# EAGLE board untitled1 (EAGLE 9.5.2)
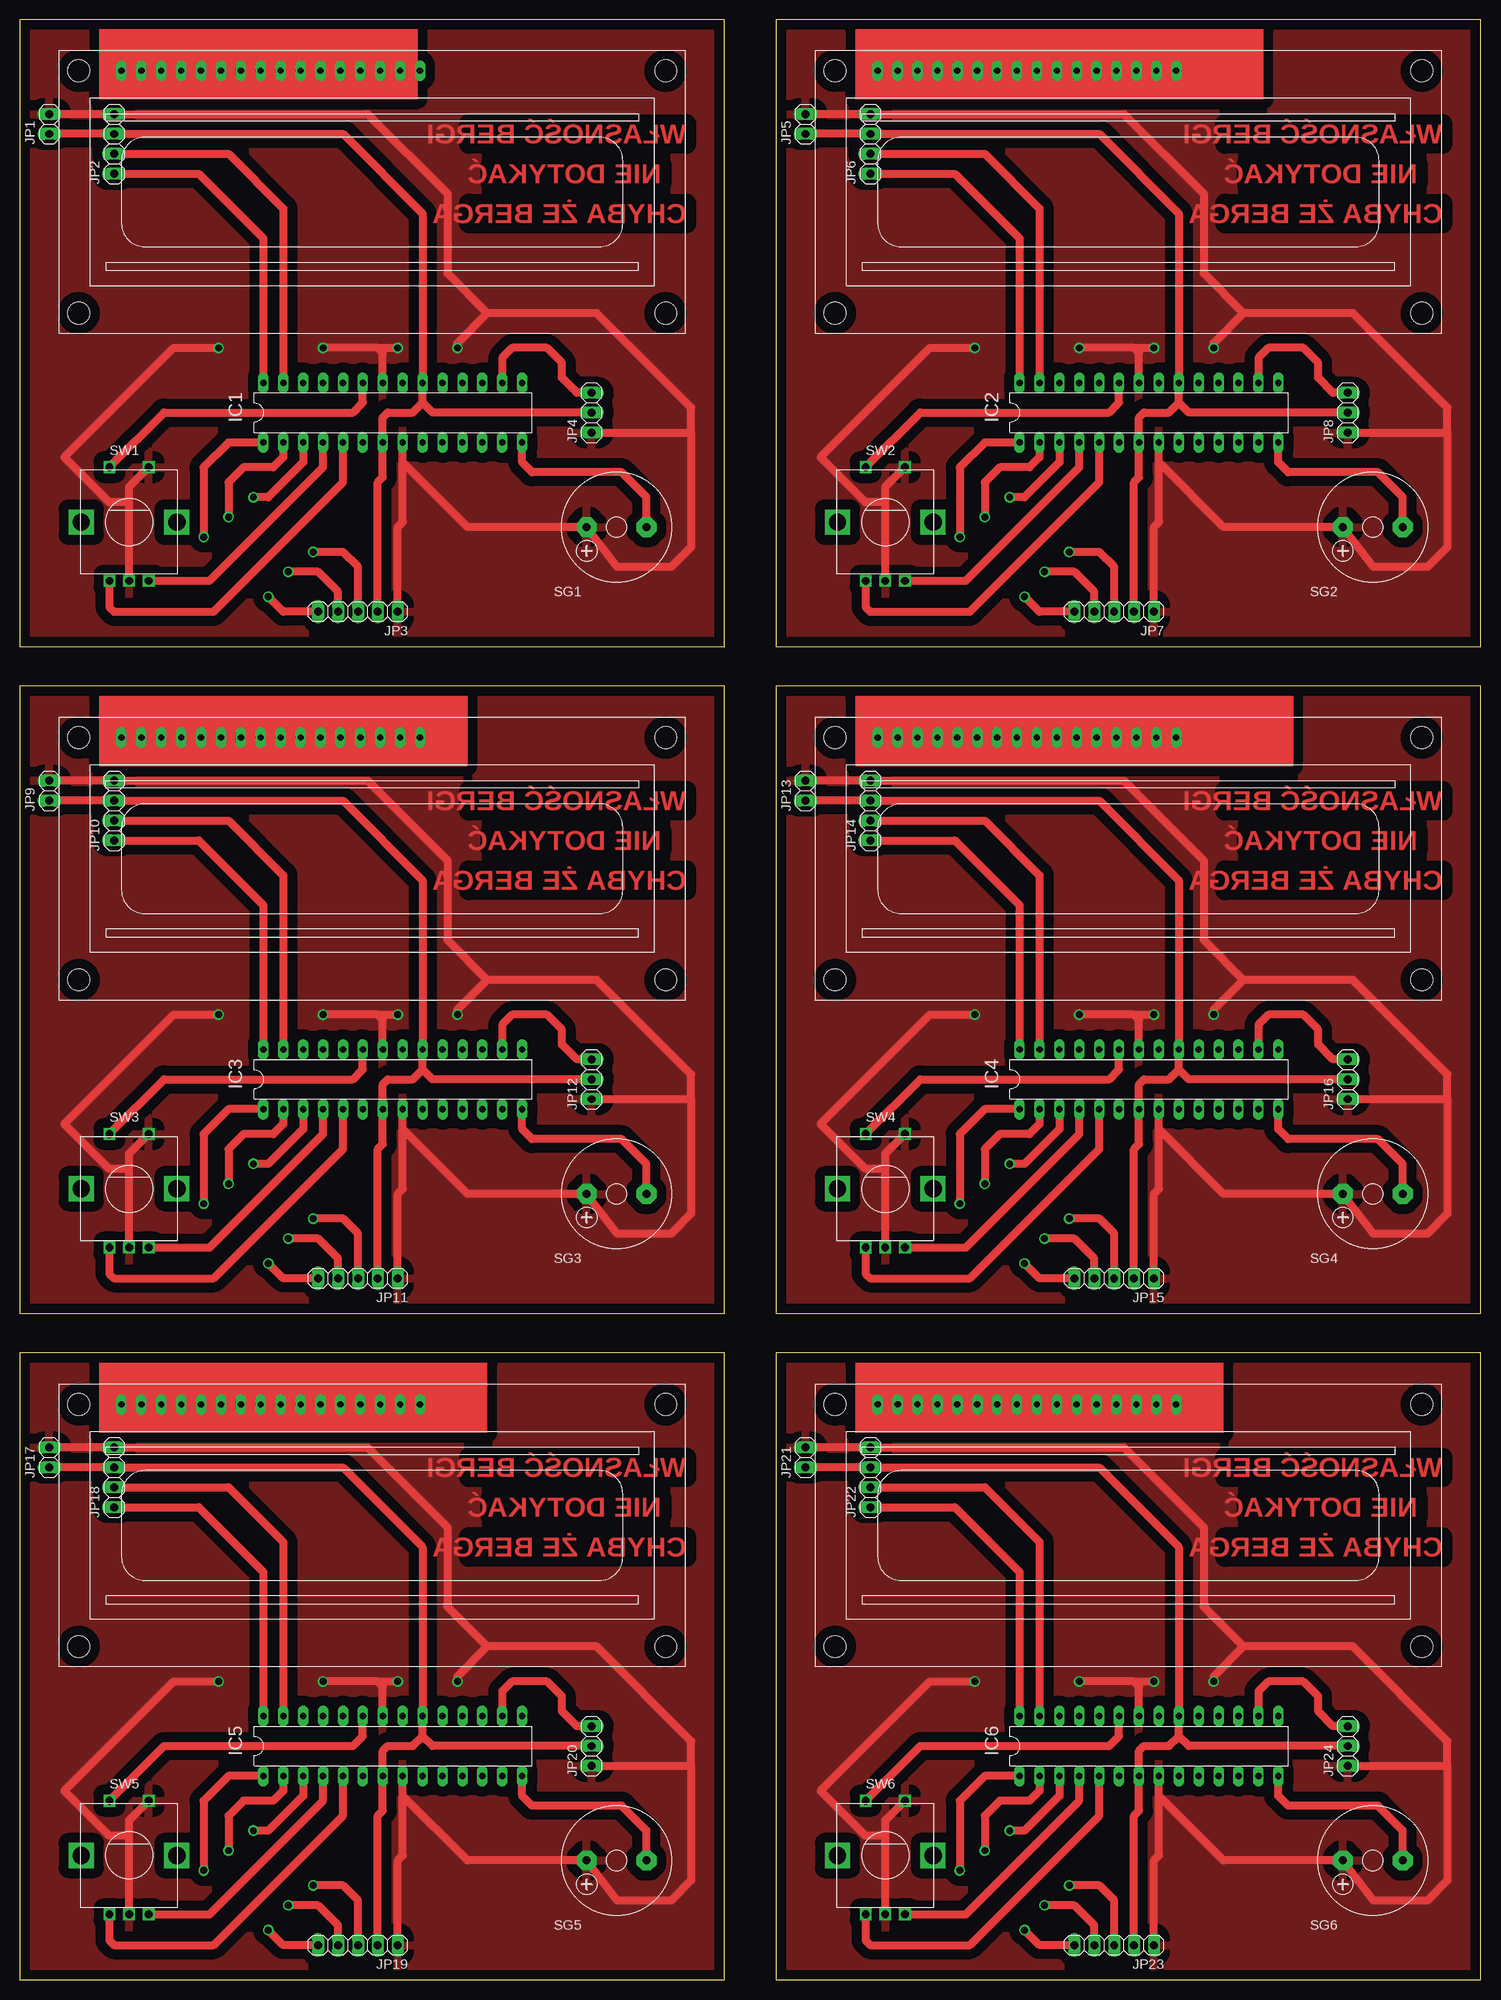
[diagram p0: board, top side]
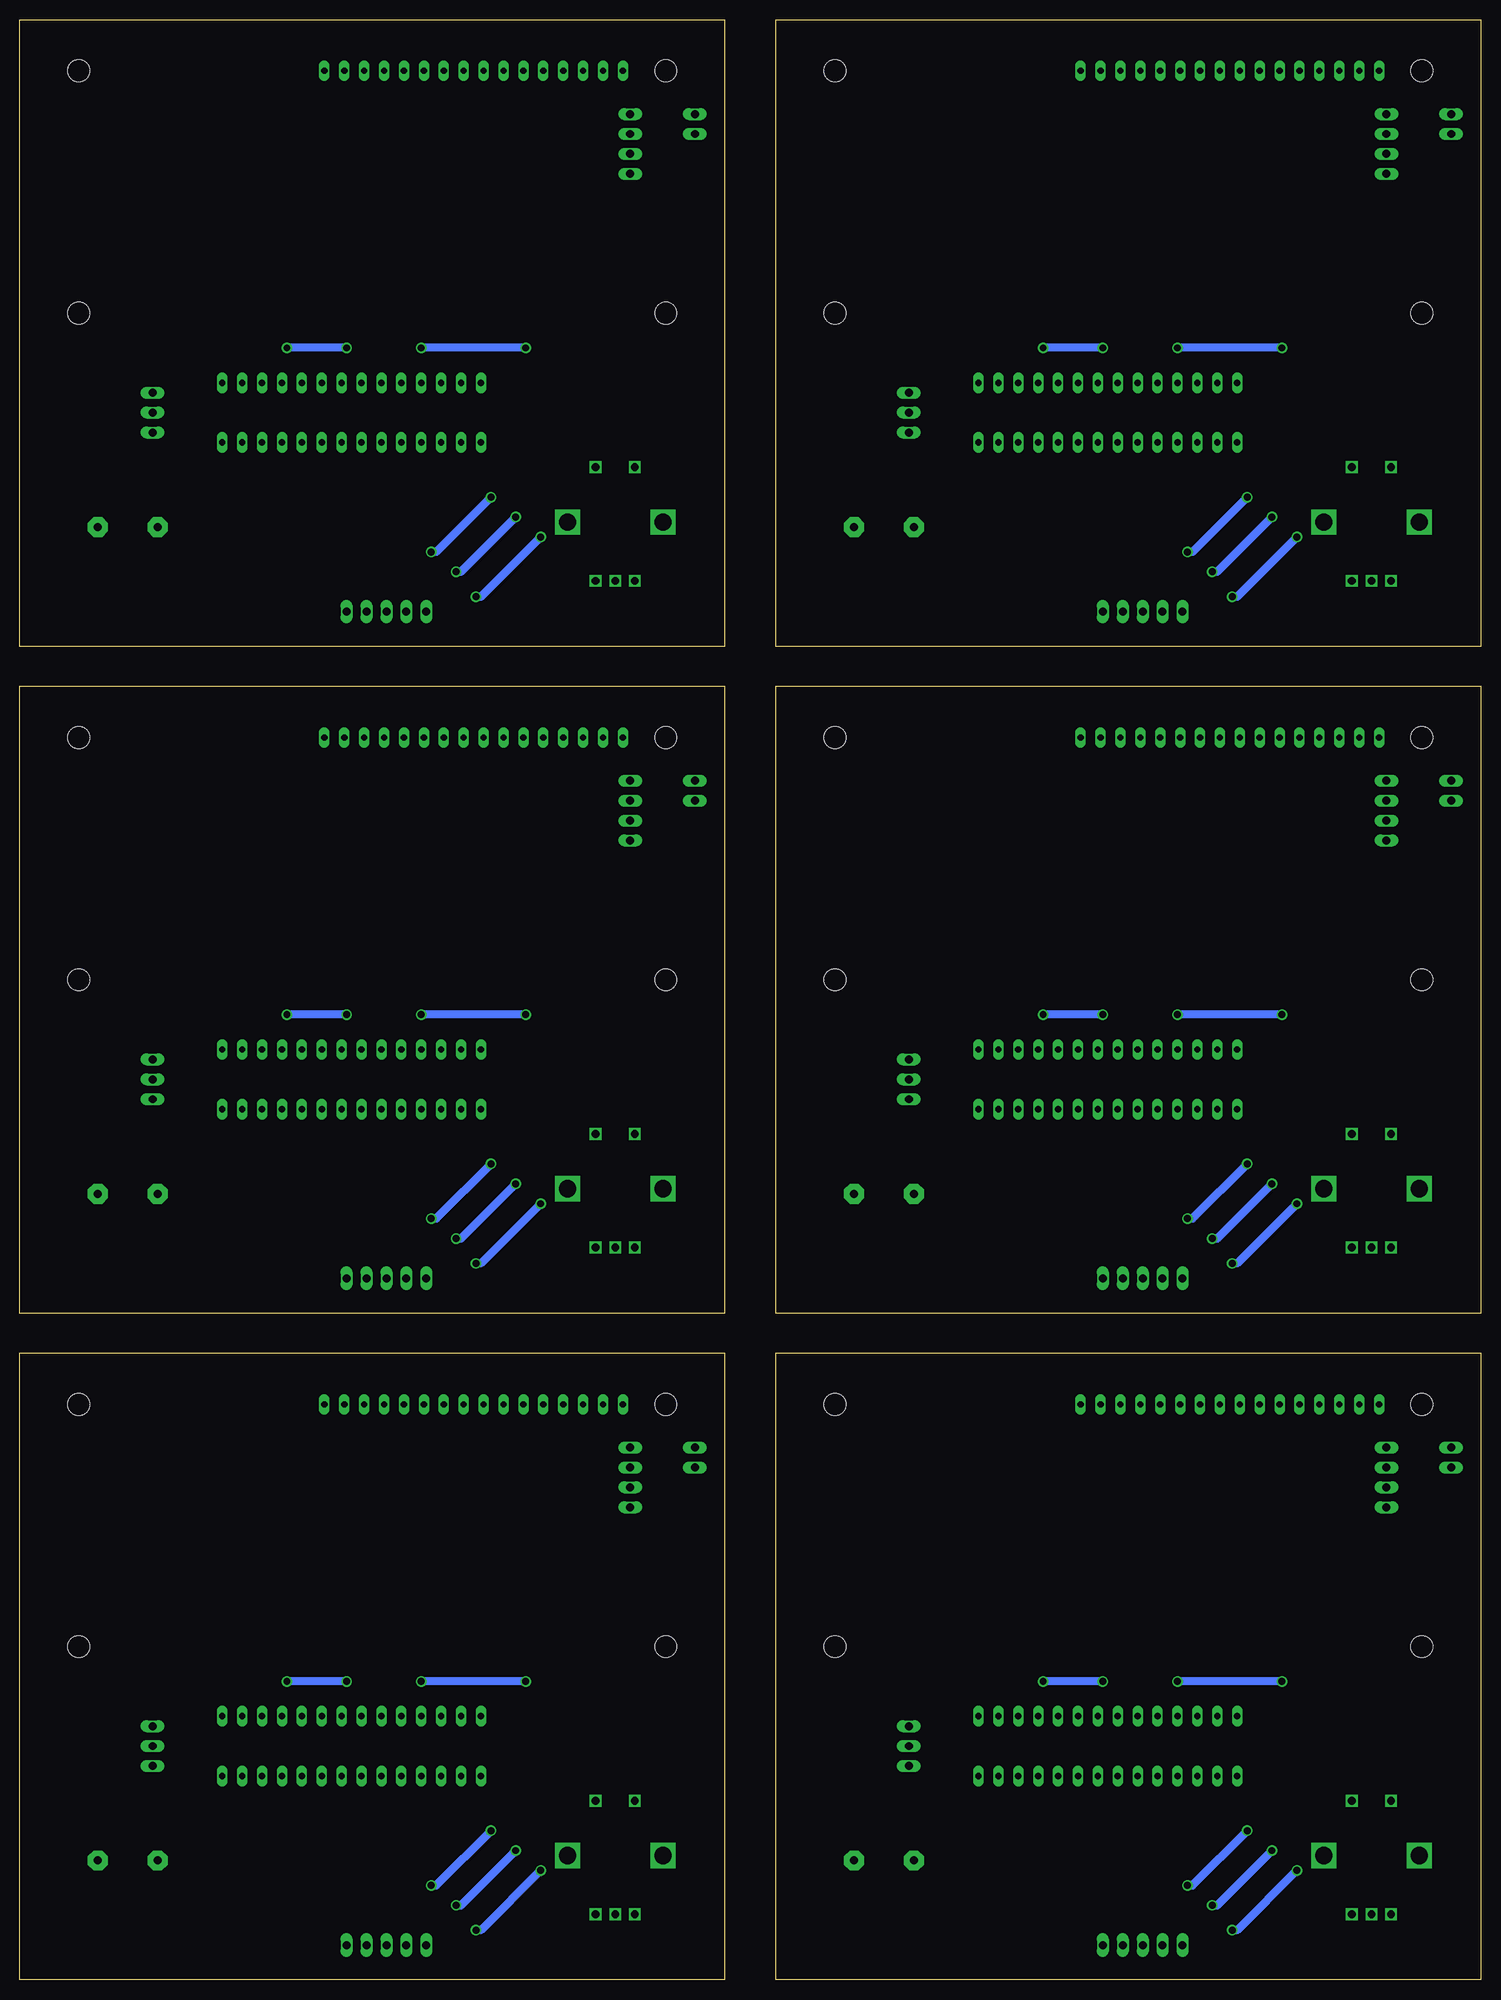
[diagram p1: board, bottom side, seen from below]

Size 186.52 x 250.18 mm. Coordinates in mm from the lower left corner, seen from the top.
Outline: 0,170.18 90,170.18 90,250.18 0,250.18 0,170.18
Outline: 96.52,170.18 186.52,170.18 186.52,250.18 96.52,250.18 96.52,170.18
Outline: 0,85.09 90,85.09 90,165.09 0,165.09 0,85.09
Outline: 96.52,85.09 186.52,85.09 186.52,165.09 96.52,165.09 96.52,85.09
Outline: 0,0 90,0 90,80 0,80 0,0
Outline: 96.52,0 186.52,0 186.52,80 96.52,80 96.52,0
Copper layers (1*16): Top 0.035mm / dielectric 1.5mm / Bottom 0.035mm
Design rules "default *": minimum track width 40mil, minimum drill 0.35mm, track to track 50mil, track to pad 50mil, pad to pad 50mil, via to via 50mil, smd to smd 50mil, copper to edge 50mil, drill to drill 50mil, minimum pad ring 10mil, minimum via ring 8mil, stop-mask expansion 4mil, vias tented up to drill 0mil, thermal gap 50mil

## Footprints (pad centres in the part's own frame; a part is rotated, then mirrored left to right if it is on the bottom)
DIL28-3 = drill 0.813 long: 1 -16.51,-3.81; 2 -13.97,-3.81; 3 -11.43,-3.81; 4 -8.89,-3.81; 5 -6.35,-3.81; 6 -3.81,-3.81; 7 -1.27,-3.81; 8 1.27,-3.81; 9 3.81,-3.81; 10 6.35,-3.81; 11 8.89,-3.81; 12 11.43,-3.81; 13 13.97,-3.81; 14 16.51,-3.81; 15 16.51,3.81; 16 13.97,3.81; 17 11.43,3.81; 18 8.89,3.81; 19 6.35,3.81; 20 3.81,3.81; 21 1.27,3.81; 22 -1.27,3.81; 23 -3.81,3.81; 24 -6.35,3.81; 25 -8.89,3.81; 26 -11.43,3.81; 27 -13.97,3.81; 28 -16.51,3.81
1X02 = drill 1.016 long: 1 -1.27,0; 2 1.27,0
1X04 = drill 1.016 long: 1 -3.81,0; 2 -1.27,0; 3 1.27,0; 4 3.81,0
1X05 = drill 1.016 long: 1 -5.08,0; 2 -2.54,0; 3 0,0; 4 2.54,0; 5 5.08,0
1X03 = drill 1.016 long: 1 -2.54,0; 2 0,0; 3 2.54,0
F/CM12P = drill 1.016 pad 2.54 octagon: + 3.81,0; - -3.81,0
ALPS_EC12E_SW = drill 1 square: A -2.5,-7.5; B 2.5,-7.5; C 0,-7.5; D -2.5,7; E 2.5,7 | drill 2.2 square: GND1 -6.1,0; GND2 6.1,0
LCD1602 = drill 0.8 long: 1 8,33.46; 2 10.54,33.46; 3 13.08,33.46; 4 15.62,33.46; 5 18.16,33.46; 6 20.7,33.46; 7 23.24,33.46; 8 25.78,33.46; 9 28.32,33.46; 10 30.86,33.46; 11 33.4,33.46; 12 35.94,33.46; 13 38.48,33.46; 14 41.02,33.46; 15 43.56,33.46; 16 46.1,33.46 | hole 2.8: 2.54,2.54; 2.54,33.46; 77.46,33.46; 77.46,2.54

## Placement (x,y rotation side)
IC1  ATMEGA168-20P  [DIL28-3]  47.62,200.03 0 top
IC2  ATMEGA168-20P  [DIL28-3]  144.14,200.03 0 top
IC3  ATMEGA168-20P  [DIL28-3]  47.62,114.94 0 top
IC4  ATMEGA168-20P  [DIL28-3]  144.14,114.94 0 top
IC5  ATMEGA168-20P  [DIL28-3]  47.62,29.84 0 top
IC6  ATMEGA168-20P  [DIL28-3]  144.14,29.84 0 top
JP1  [1X02]  3.81,236.86 90 top
JP2  [1X04]  12.07,234.31 90 top
JP3  [1X05]  43.18,174.62 180 top
JP4  [1X03]  73.03,200.03 90 top
JP5  [1X02]  100.33,236.86 90 top
JP6  [1X04]  108.59,234.31 90 top
JP7  [1X05]  139.7,174.62 180 top
JP8  [1X03]  169.54,200.03 90 top
JP9  [1X02]  3.81,151.77 90 top
JP10  [1X04]  12.07,149.23 90 top
JP11  [1X05]  43.18,89.54 180 top
JP12  [1X03]  73.03,114.94 90 top
JP13  [1X02]  100.33,151.77 90 top
JP14  [1X04]  108.59,149.23 90 top
JP15  [1X05]  139.7,89.54 180 top
JP16  [1X03]  169.54,114.94 90 top
JP17  [1X02]  3.81,66.68 90 top
JP18  [1X04]  12.07,64.14 90 top
JP19  [1X05]  43.18,4.44 180 top
JP20  [1X03]  73.03,29.84 90 top
JP21  [1X02]  100.33,66.68 90 top
JP22  [1X04]  108.59,64.14 90 top
JP23  [1X05]  139.7,4.44 180 top
JP24  [1X03]  169.54,29.84 90 top
SG1  F/CM12P  [F/CM12P]  76.2,185.42 180 top
SG2  F/CM12P  [F/CM12P]  172.72,185.42 180 top
SG3  F/CM12P  [F/CM12P]  76.2,100.33 180 top
SG4  F/CM12P  [F/CM12P]  172.72,100.33 180 top
SG5  F/CM12P  [F/CM12P]  76.2,15.24 180 top
SG6  F/CM12P  [F/CM12P]  172.72,15.24 180 top
SW1  EC12E_SW  [ALPS_EC12E_SW]  13.97,186.06 0 top
SW2  EC12E_SW  [ALPS_EC12E_SW]  110.49,186.06 0 top
SW3  EC12E_SW  [ALPS_EC12E_SW]  13.97,100.97 0 top
SW4  EC12E_SW  [ALPS_EC12E_SW]  110.49,100.97 0 top
SW5  EC12E_SW  [ALPS_EC12E_SW]  13.97,15.88 0 top
SW6  EC12E_SW  [ALPS_EC12E_SW]  110.49,15.88 0 top
X1  HD44780LCD-1602  [LCD1602]  5,210.18 0 top
X2  HD44780LCD-1602  [LCD1602]  101.52,210.18 0 top
X3  HD44780LCD-1602  [LCD1602]  5,125.09 0 top
X4  HD44780LCD-1602  [LCD1602]  101.52,125.09 0 top
X5  HD44780LCD-1602  [LCD1602]  5,40 0 top
X6  HD44780LCD-1602  [LCD1602]  101.52,40 0 top

## Library data of the parts
IC1-IC6 X1-X6 = adafruit
JP1-JP24 = pinhead
SG1-SG6 = buzzer; OC_FARNELL: unknown; OC_NEWARK: unknown
SW1-SW6 = switch-alps; MPN: EC12E2424407; OC_FARNELL: 1520813; OC_NEWARK: 74M1068

## Nets
GND: IC1.8 IC1.22 JP1.2 JP2.4 JP3.1 JP4.1 SG1.+ SW1.C SW1.E
GND1: IC2.8 IC2.22 JP5.2 JP6.4 JP7.1 JP8.1 SG2.+ SW2.C SW2.E
GND2: IC3.8 IC3.22 JP9.2 JP10.4 JP11.1 JP12.1 SG3.+ SW3.C SW3.E
GND3: IC4.8 IC4.22 JP13.2 JP14.4 JP15.1 JP16.1 SG4.+ SW4.C SW4.E
GND4: IC5.8 IC5.22 JP17.2 JP18.4 JP19.1 JP20.1 SG5.+ SW5.C SW5.E
GND5: IC6.8 IC6.22 JP21.2 JP22.4 JP23.1 JP24.1 SG6.+ SW6.C SW6.E
N$1: IC1.3 JP3.3
N$2: IC1.23 SW1.D
N$3: IC1.4 SW1.B
N$4: IC1.5 SW1.A
N$5: IC1.2 JP3.4
N$6: IC1.14 SG1.-
N$7: IC1.1 JP3.5
N$8: IC2.23 SW2.D
N$9: IC1.16 JP4.3
N$10: IC2.4 SW2.B
N$11: IC2.5 SW2.A
N$12: IC2.16 JP8.3
N$13: IC2.14 SG2.-
N$14: IC2.3 JP7.3
N$15: IC2.2 JP7.4
N$16: IC2.1 JP7.5
N$17: IC3.23 SW3.D
N$18: IC3.4 SW3.B
N$19: IC3.5 SW3.A
N$20: IC3.16 JP12.3
N$21: IC3.14 SG3.-
N$22: IC3.3 JP11.3
N$23: IC3.2 JP11.4
N$24: IC3.1 JP11.5
N$25: IC4.23 SW4.D
N$26: IC4.4 SW4.B
N$27: IC4.5 SW4.A
N$28: IC4.16 JP16.3
N$29: IC4.14 SG4.-
N$30: IC4.3 JP15.3
N$31: IC4.2 JP15.4
N$32: IC4.1 JP15.5
N$33: IC5.23 SW5.D
N$34: IC5.4 SW5.B
N$35: IC5.5 SW5.A
N$36: IC5.16 JP20.3
N$37: IC5.14 SG5.-
N$38: IC5.3 JP19.3
N$39: IC5.2 JP19.4
N$40: IC5.1 JP19.5
N$41: IC6.23 SW6.D
N$42: IC6.4 SW6.B
N$43: IC6.5 SW6.A
N$44: IC6.16 JP24.3
N$45: IC6.14 SG6.-
N$46: IC6.3 JP23.3
N$47: IC6.2 JP23.4
N$48: IC6.1 JP23.5
SCL: IC1.28 JP2.1
SCL1: IC2.28 JP6.1
SCL2: IC3.28 JP10.1
SCL3: IC4.28 JP14.1
SCL4: IC5.28 JP18.1
SCL5: IC6.28 JP22.1
SDA: IC1.27 JP2.2
SDA1: IC2.27 JP6.2
SDA2: IC3.27 JP10.2
SDA3: IC4.27 JP14.2
SDA4: IC5.27 JP18.2
SDA5: IC6.27 JP22.2
VCC: IC1.7 IC1.20 JP1.1 JP2.3 JP3.2 JP4.2
VCC1: IC2.7 IC2.20 JP5.1 JP6.3 JP7.2 JP8.2
VCC2: IC3.7 IC3.20 JP9.1 JP10.3 JP11.2 JP12.2
VCC3: IC4.7 IC4.20 JP13.1 JP14.3 JP15.2 JP16.2
VCC4: IC5.7 IC5.20 JP17.1 JP18.3 JP19.2 JP20.2
VCC5: IC6.7 IC6.20 JP21.1 JP22.3 JP23.2 JP24.2

## Tracks (layer width: path | path; a pad name or v marks a point on that pad's centre or on a via)
GND  (via drill 0.89)
  Top 1.016: JP1.2 JP2.4 44.45,238.12 54.61,227.97 54.61,217.81 59.69,212.73 | SW1.C 13.97,188.59 | 13.97,188.59 13.97,190.56 SW1.E | 48.89,193.68 57.15,185.42 SG1.+ 76.28,180.34 83.19,180.34 85.73,182.88 85.73,197.49 | 48.89,193.68 IC1.8 | JP3.1 48.26,185.42 48.89,186.06 48.89,193.68 | 13.97,188.59 11.43,188.59 5.71,194.31 19.68,208.28 v25.4,208.28 | IC1.22 46.35,207.65 45.72,208.28 | 45.72,208.28 v38.73,208.28 | 45.72,208.28 v48.26,208.28 | JP4.1 85.73,197.49 | 85.73,197.49 85.73,200.66 73.66,212.73 59.69,212.73 | 59.69,212.73 55.88,208.92 v55.88,208.28
  Bottom 1.016: v25.4,208.28 v38.73,208.28 | v48.26,208.28 v55.88,208.28
  pour Top: 0,250.19 0,170.18 90.17,170.18 90.17,250.19
GND1  (via drill 0.89)
  Top 1.016: JP5.2 JP6.4 140.97,238.12 151.13,227.97 151.13,217.81 156.21,212.73 | SW2.C 110.49,188.59 | 110.49,188.59 110.49,190.56 SW2.E | 145.41,193.68 153.67,185.42 SG2.+ 172.8,180.34 179.7,180.34 182.24,182.88 182.24,197.49 | 145.41,193.68 IC2.8 | JP7.1 144.78,185.42 145.41,186.06 145.41,193.68 | 110.49,188.59 107.95,188.59 102.23,194.31 116.2,208.28 v121.92,208.28 | IC2.22 142.88,207.65 142.24,208.28 | 142.24,208.28 v135.25,208.28 | 142.24,208.28 v144.78,208.28 | JP8.1 182.24,197.49 | 182.24,197.49 182.24,200.66 170.18,212.73 156.21,212.73 | 156.21,212.73 152.4,208.92 v152.4,208.28
  Bottom 1.016: v121.92,208.28 v135.25,208.28 | v144.78,208.28 v152.4,208.28
  pour Top: 96.52,250.19 96.52,170.18 186.69,170.18 186.69,250.19
GND2  (via drill 0.89)
  Top 1.016: JP9.2 JP10.4 44.45,153.03 54.61,142.88 54.61,132.72 59.69,127.64 | SW3.C 13.97,103.51 | 13.97,103.51 13.97,105.47 SW3.E | 48.89,108.59 57.15,100.33 SG3.+ 76.28,95.25 83.19,95.25 85.73,97.79 85.73,112.4 | 48.89,108.59 IC3.8 | JP11.1 48.26,100.33 48.89,100.97 48.89,108.59 | 13.97,103.51 11.43,103.51 5.71,109.22 19.68,123.19 v25.4,123.19 | IC3.22 46.35,122.56 45.72,123.19 | 45.72,123.19 v38.73,123.19 | 45.72,123.19 v48.26,123.19 | JP12.1 85.73,112.4 | 85.73,112.4 85.73,115.57 73.66,127.64 59.69,127.64 | 59.69,127.64 55.88,123.83 v55.88,123.19
  Bottom 1.016: v25.4,123.19 v38.73,123.19 | v48.26,123.19 v55.88,123.19
  pour Top: 0,165.1 0,85.09 90.17,85.09 90.17,165.1
GND3  (via drill 0.89)
  Top 1.016: JP13.2 JP14.4 140.97,153.03 151.13,142.88 151.13,132.72 156.21,127.64 | SW4.C 110.49,103.51 | 110.49,103.51 110.49,105.47 SW4.E | 145.41,108.59 153.67,100.33 SG4.+ 172.8,95.25 179.7,95.25 182.24,97.79 182.24,112.4 | 145.41,108.59 IC4.8 | JP15.1 144.78,100.33 145.41,100.97 145.41,108.59 | 110.49,103.51 107.95,103.51 102.23,109.22 116.2,123.19 v121.92,123.19 | IC4.22 142.88,122.56 142.24,123.19 | 142.24,123.19 v135.25,123.19 | 142.24,123.19 v144.78,123.19 | JP16.1 182.24,112.4 | 182.24,112.4 182.24,115.57 170.18,127.64 156.21,127.64 | 156.21,127.64 152.4,123.83 v152.4,123.19
  Bottom 1.016: v121.92,123.19 v135.25,123.19 | v144.78,123.19 v152.4,123.19
  pour Top: 96.52,165.1 96.52,85.09 186.69,85.09 186.69,165.1
GND4  (via drill 0.89)
  Top 1.016: JP17.2 JP18.4 44.45,67.95 54.61,57.79 54.61,47.62 59.69,42.55 | SW5.C 13.97,18.42 | 13.97,18.42 13.97,20.38 SW5.E | 48.89,23.5 57.15,15.24 SG5.+ 76.28,10.16 83.19,10.16 85.73,12.7 85.73,27.31 | 48.89,23.5 IC5.8 | JP19.1 48.26,15.24 48.89,15.88 48.89,23.5 | 13.97,18.42 11.43,18.42 5.71,24.13 19.68,38.1 v25.4,38.1 | IC5.22 46.35,37.47 45.72,38.1 | 45.72,38.1 v38.73,38.1 | 45.72,38.1 v48.26,38.1 | JP20.1 85.73,27.31 | 85.73,27.31 85.73,30.48 73.66,42.55 59.69,42.55 | 59.69,42.55 55.88,38.74 v55.88,38.1
  Bottom 1.016: v25.4,38.1 v38.73,38.1 | v48.26,38.1 v55.88,38.1
  pour Top: 0,80.01 0,0 90.17,0 90.17,80.01
GND5  (via drill 0.89)
  Top 1.016: JP21.2 JP22.4 140.97,67.95 151.13,57.79 151.13,47.62 156.21,42.55 | SW6.C 110.49,18.42 | 110.49,18.42 110.49,20.38 SW6.E | 145.41,23.5 153.67,15.24 SG6.+ 172.8,10.16 179.7,10.16 182.24,12.7 182.24,27.31 | 145.41,23.5 IC6.8 | JP23.1 144.78,15.24 145.41,15.88 145.41,23.5 | 110.49,18.42 107.95,18.42 102.23,24.13 116.2,38.1 v121.92,38.1 | IC6.22 142.88,37.47 142.24,38.1 | 142.24,38.1 v135.25,38.1 | 142.24,38.1 v144.78,38.1 | JP24.1 182.24,27.31 | 182.24,27.31 182.24,30.48 170.18,42.55 156.21,42.55 | 156.21,42.55 152.4,38.74 v152.4,38.1
  Bottom 1.016: v121.92,38.1 v135.25,38.1 | v144.78,38.1 v152.4,38.1
  pour Top: 96.52,80.01 96.52,0 186.69,0 186.69,80.01
N$1  (via drill 0.89)
  Top 1.016: IC1.3 36.2,193.68 31.75,189.23 v29.84,189.23 | JP3.3 43.18,180.34 41.27,182.25 v37.46,182.25
  Bottom 1.016: v29.84,189.23 36.83,182.25 v37.46,182.25
N$2
  Top 1.016: SW1.D 18.44,200.03 42.54,200.03 43.81,201.3 IC1.23
N$3
  Top 1.016: SW1.B 24.25,178.56 38.73,193.04 IC1.4
N$4
  Top 1.016: SW1.A 11.47,175.22 12.07,174.62 24.77,174.62 41.27,191.13 IC1.5
N$5  (via drill 0.89)
  Top 1.016: JP3.4 40.64,177.17 38.1,179.71 v34.29,179.71 | IC1.2 33.65,194.31 32.38,193.04 28.57,193.04 26.67,191.13 v26.67,186.69
  Bottom 1.016: v26.67,186.69 33.65,179.71 v34.29,179.71
N$6
  Top 1.016: SG1.- 80.01,189.28 79.93,189.31 76.84,192.41 65.41,192.41 64.14,193.68 IC1.14
N$7  (via drill 0.89)
  Top 1.016: IC1.1 26.67,196.22 23.5,193.04 v23.5,184.15 | JP3.5 33.65,174.62 v31.75,176.53
  Bottom 1.016: v23.5,184.15 31.11,176.53 v31.75,176.53
N$8
  Top 1.016: SW2.D 114.96,200.03 139.06,200.03 140.33,201.3 IC2.23
N$9
  Top 1.016: JP4.3 71.12,202.56 69.22,204.47 69.22,206.38 67.31,208.28 62.87,208.28 61.59,207.01 IC1.16
N$10
  Top 1.016: SW2.B 120.77,178.56 135.25,193.04 IC2.4
N$11
  Top 1.016: SW2.A 107.99,175.22 108.59,174.62 121.29,174.62 137.79,191.13 IC2.5
N$12
  Top 1.016: JP8.3 167.64,202.56 165.73,204.47 165.73,206.38 163.83,208.28 159.38,208.28 158.11,207.01 IC2.16
N$13
  Top 1.016: SG2.- 176.53,189.28 176.45,189.31 173.35,192.41 161.92,192.41 160.66,193.68 IC2.14
N$14  (via drill 0.89)
  Top 1.016: IC2.3 132.72,193.68 128.27,189.23 v126.37,189.23 | JP7.3 139.7,180.34 137.79,182.25 v133.98,182.25
  Bottom 1.016: v126.37,189.23 133.35,182.25 v133.98,182.25
N$15  (via drill 0.89)
  Top 1.016: JP7.4 137.16,177.17 134.62,179.71 v130.81,179.71 | IC2.2 130.17,194.31 128.91,193.04 125.09,193.04 123.19,191.13 v123.19,186.69
  Bottom 1.016: v123.19,186.69 130.17,179.71 v130.81,179.71
N$16  (via drill 0.89)
  Top 1.016: IC2.1 123.19,196.22 120.02,193.04 v120.02,184.15 | JP7.5 130.17,174.62 v128.27,176.53
  Bottom 1.016: v120.02,184.15 127.64,176.53 v128.27,176.53
N$17
  Top 1.016: SW3.D 18.44,114.94 42.54,114.94 43.81,116.21 IC3.23
N$18
  Top 1.016: SW3.B 24.25,93.47 38.73,107.95 IC3.4
N$19
  Top 1.016: SW3.A 11.47,90.13 12.07,89.54 24.77,89.54 41.27,106.05 IC3.5
N$20
  Top 1.016: JP12.3 71.12,117.48 69.22,119.38 69.22,121.28 67.31,123.19 62.87,123.19 61.59,121.92 IC3.16
N$21
  Top 1.016: SG3.- 80.01,104.19 79.93,104.22 76.84,107.31 65.41,107.31 64.14,108.59 IC3.14
N$22  (via drill 0.89)
  Top 1.016: IC3.3 36.2,108.59 31.75,104.14 v29.84,104.14 | JP11.3 43.18,95.25 41.27,97.16 v37.46,97.16
  Bottom 1.016: v29.84,104.14 36.83,97.16 v37.46,97.16
N$23  (via drill 0.89)
  Top 1.016: JP11.4 40.64,92.08 38.1,94.62 v34.29,94.62 | IC3.2 33.65,109.22 32.38,107.95 28.57,107.95 26.67,106.05 v26.67,101.6
  Bottom 1.016: v26.67,101.6 33.65,94.62 v34.29,94.62
N$24  (via drill 0.89)
  Top 1.016: IC3.1 26.67,111.12 23.5,107.95 v23.5,99.06 | JP11.5 33.65,89.54 v31.75,91.44
  Bottom 1.016: v23.5,99.06 31.11,91.44 v31.75,91.44
N$25
  Top 1.016: SW4.D 114.96,114.94 139.06,114.94 140.33,116.21 IC4.23
N$26
  Top 1.016: SW4.B 120.77,93.47 135.25,107.95 IC4.4
N$27
  Top 1.016: SW4.A 107.99,90.13 108.59,89.54 121.29,89.54 137.79,106.05 IC4.5
N$28
  Top 1.016: JP16.3 167.64,117.48 165.73,119.38 165.73,121.28 163.83,123.19 159.38,123.19 158.11,121.92 IC4.16
N$29
  Top 1.016: SG4.- 176.53,104.19 176.45,104.22 173.35,107.31 161.92,107.31 160.66,108.59 IC4.14
N$30  (via drill 0.89)
  Top 1.016: IC4.3 132.72,108.59 128.27,104.14 v126.37,104.14 | JP15.3 139.7,95.25 137.79,97.16 v133.98,97.16
  Bottom 1.016: v126.37,104.14 133.35,97.16 v133.98,97.16
N$31  (via drill 0.89)
  Top 1.016: JP15.4 137.16,92.08 134.62,94.62 v130.81,94.62 | IC4.2 130.17,109.22 128.91,107.95 125.09,107.95 123.19,106.05 v123.19,101.6
  Bottom 1.016: v123.19,101.6 130.17,94.62 v130.81,94.62
N$32  (via drill 0.89)
  Top 1.016: IC4.1 123.19,111.12 120.02,107.95 v120.02,99.06 | JP15.5 130.17,89.54 v128.27,91.44
  Bottom 1.016: v120.02,99.06 127.64,91.44 v128.27,91.44
N$33
  Top 1.016: SW5.D 18.44,29.84 42.54,29.84 43.81,31.12 IC5.23
N$34
  Top 1.016: SW5.B 24.25,8.38 38.73,22.86 IC5.4
N$35
  Top 1.016: SW5.A 11.47,5.04 12.07,4.44 24.77,4.44 41.27,20.96 IC5.5
N$36
  Top 1.016: JP20.3 71.12,32.39 69.22,34.29 69.22,36.19 67.31,38.1 62.87,38.1 61.59,36.83 IC5.16
N$37
  Top 1.016: SG5.- 80.01,19.1 79.93,19.13 76.84,22.22 65.41,22.22 64.14,23.5 IC5.14
N$38  (via drill 0.89)
  Top 1.016: IC5.3 36.2,23.5 31.75,19.05 v29.84,19.05 | JP19.3 43.18,10.16 41.27,12.06 v37.46,12.06
  Bottom 1.016: v29.84,19.05 36.83,12.06 v37.46,12.06
N$39  (via drill 0.89)
  Top 1.016: JP19.4 40.64,6.99 38.1,9.53 v34.29,9.53 | IC5.2 33.65,24.13 32.38,22.86 28.57,22.86 26.67,20.96 v26.67,16.51
  Bottom 1.016: v26.67,16.51 33.65,9.53 v34.29,9.53
N$40  (via drill 0.89)
  Top 1.016: IC5.1 26.67,26.03 23.5,22.86 v23.5,13.97 | JP19.5 33.65,4.44 v31.75,6.35
  Bottom 1.016: v23.5,13.97 31.11,6.35 v31.75,6.35
N$41
  Top 1.016: SW6.D 114.96,29.84 139.06,29.84 140.33,31.12 IC6.23
N$42
  Top 1.016: SW6.B 120.77,8.38 135.25,22.86 IC6.4
N$43
  Top 1.016: SW6.A 107.99,5.04 108.59,4.44 121.29,4.44 137.79,20.96 IC6.5
N$44
  Top 1.016: JP24.3 167.64,32.39 165.73,34.29 165.73,36.19 163.83,38.1 159.38,38.1 158.11,36.83 IC6.16
N$45
  Top 1.016: SG6.- 176.53,19.1 176.45,19.13 173.35,22.22 161.92,22.22 160.66,23.5 IC6.14
N$46  (via drill 0.89)
  Top 1.016: IC6.3 132.72,23.5 128.27,19.05 v126.37,19.05 | JP23.3 139.7,10.16 137.79,12.06 v133.98,12.06
  Bottom 1.016: v126.37,19.05 133.35,12.06 v133.98,12.06
N$47  (via drill 0.89)
  Top 1.016: JP23.4 137.16,6.99 134.62,9.53 v130.81,9.53 | IC6.2 130.17,24.13 128.91,22.86 125.09,22.86 123.19,20.96 v123.19,16.51
  Bottom 1.016: v123.19,16.51 130.17,9.53 v130.81,9.53
N$48  (via drill 0.89)
  Top 1.016: IC6.1 123.19,26.03 120.02,22.86 v120.02,13.97 | JP23.5 130.17,4.44 v128.27,6.35
  Bottom 1.016: v120.02,13.97 127.64,6.35 v128.27,6.35
SCL
  Top 1.016: JP2.1 22.86,230.5 31.11,222.25 IC1.28
SCL1
  Top 1.016: JP6.1 119.38,230.5 127.64,222.25 IC2.28
SCL2
  Top 1.016: JP10.1 22.86,145.42 31.11,137.16 IC3.28
SCL3
  Top 1.016: JP14.1 119.38,145.42 127.64,137.16 IC4.28
SCL4
  Top 1.016: JP18.1 22.86,60.33 31.11,52.07 IC5.28
SCL5
  Top 1.016: JP22.1 119.38,60.33 127.64,52.07 IC6.28
SDA
  Top 1.016: JP2.2 26.67,233.05 33.65,226.06 IC1.27
SDA1
  Top 1.016: JP6.2 123.19,233.05 130.17,226.06 IC2.27
SDA2
  Top 1.016: JP10.2 26.67,147.96 33.65,140.97 IC3.27
SDA3
  Top 1.016: JP14.2 123.19,147.96 130.17,140.97 IC4.27
SDA4
  Top 1.016: JP18.2 26.67,62.87 33.65,55.88 IC5.27
SDA5
  Top 1.016: JP22.2 123.19,62.87 130.17,55.88 IC6.27
VCC
  Top 1.016: JP1.1 JP2.3 41.27,235.59 51.43,225.43 IC1.20 51.43,201.3 | 51.43,201.3 50.16,200.03 46.99,200.03 46.35,199.39 IC1.7 46.35,191.77 45.72,191.13 JP3.2 | JP4.2 52.7,200.03 51.43,201.3
VCC1
  Top 1.016: JP5.1 JP6.3 137.79,235.59 147.95,225.43 IC2.20 147.95,201.3 | 147.95,201.3 146.69,200.03 143.51,200.03 142.88,199.39 IC2.7 142.88,191.77 142.24,191.13 JP7.2 | JP8.2 149.22,200.03 147.95,201.3
VCC2
  Top 1.016: JP9.1 JP10.3 41.27,150.5 51.43,140.34 IC3.20 51.43,116.21 | 51.43,116.21 50.16,114.94 46.99,114.94 46.35,114.3 IC3.7 46.35,106.68 45.72,106.05 JP11.2 | JP12.2 52.7,114.94 51.43,116.21
VCC3
  Top 1.016: JP13.1 JP14.3 137.79,150.5 147.95,140.34 IC4.20 147.95,116.21 | 147.95,116.21 146.69,114.94 143.51,114.94 142.88,114.3 IC4.7 142.88,106.68 142.24,106.05 JP15.2 | JP16.2 149.22,114.94 147.95,116.21
VCC4
  Top 1.016: JP17.1 JP18.3 41.27,65.41 51.43,55.25 IC5.20 51.43,31.12 | 51.43,31.12 50.16,29.84 46.99,29.84 46.35,29.21 IC5.7 46.35,21.59 45.72,20.96 JP19.2 | JP20.2 52.7,29.84 51.43,31.12
VCC5
  Top 1.016: JP21.1 JP22.3 137.79,65.41 147.95,55.25 IC6.20 147.95,31.12 | 147.95,31.12 146.69,29.84 143.51,29.84 142.88,29.21 IC6.7 142.88,21.59 142.24,20.96 JP23.2 | JP24.2 149.22,29.84 147.95,31.12
(copper drawn outside any net)
  shapes: Top area x6

## Text on the board
Top: WŁASNOŚĆ BERGI | WŁASNOŚĆ BERGI | NIE DOTYKAĆ | NIE DOTYKAĆ | CHYBA ŻE BERGA | CHYBA ŻE BERGA | WŁASNOŚĆ BERGI | WŁASNOŚĆ BERGI | NIE DOTYKAĆ | NIE DOTYKAĆ | CHYBA ŻE BERGA | CHYBA ŻE BERGA | WŁASNOŚĆ BERGI | WŁASNOŚĆ BERGI | NIE DOTYKAĆ | NIE DOTYKAĆ | CHYBA ŻE BERGA | CHYBA ŻE BERGA